# EAGLE board ArduinoMiniProgrammer (EAGLE 7.6.0)
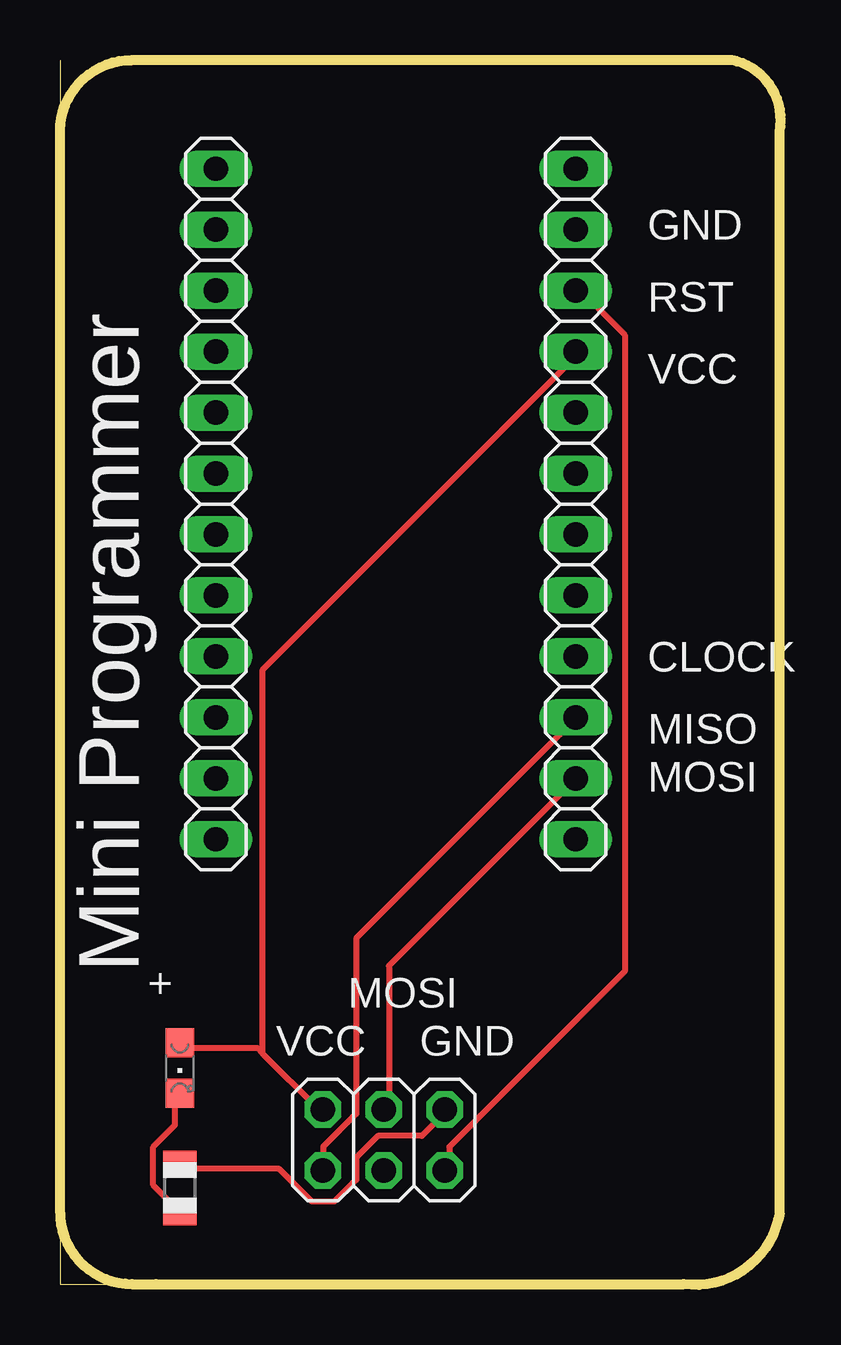
[diagram p0: board, top side]
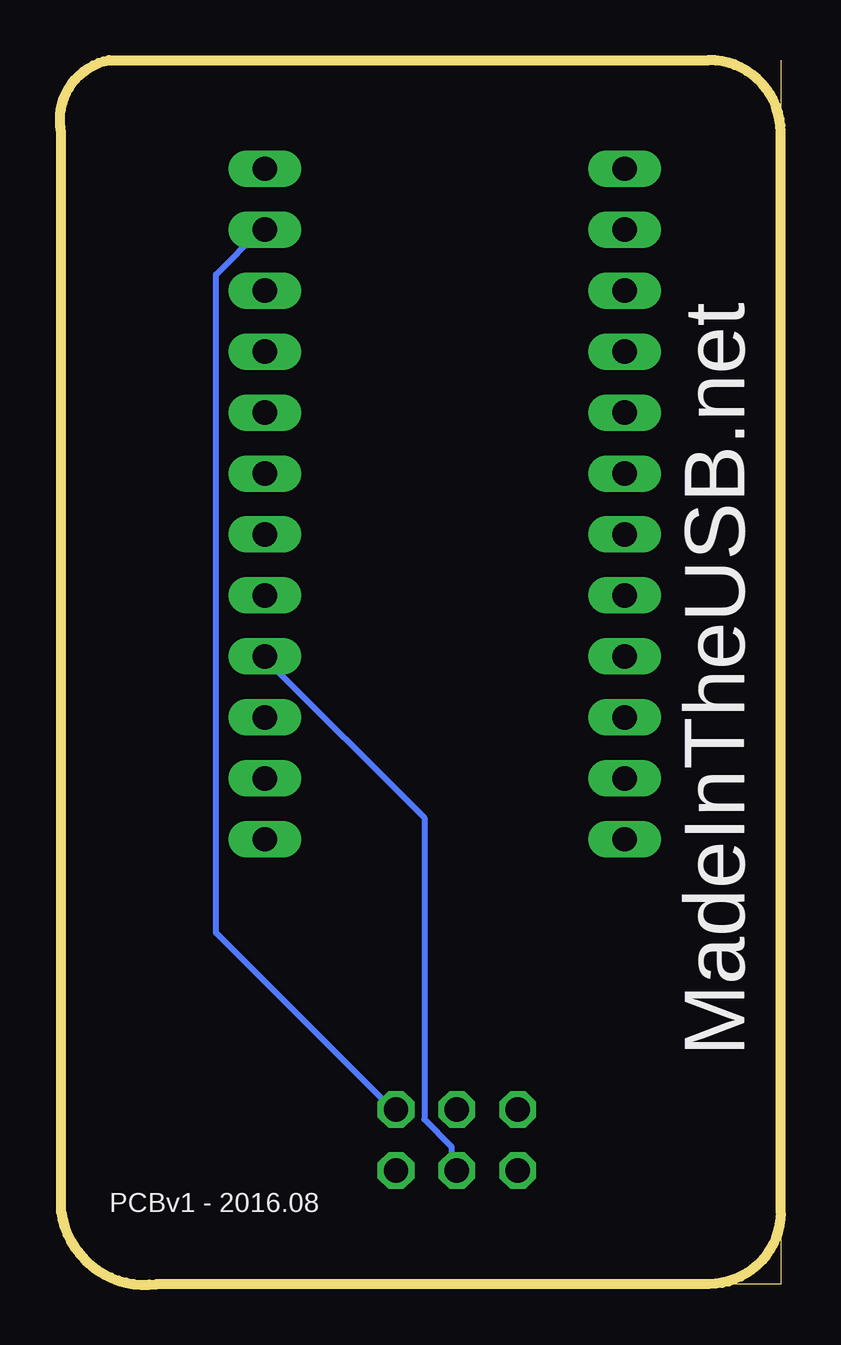
[diagram p1: board, bottom side, seen from below]

Size 30.05 x 51.03 mm. Coordinates in mm from the lower left corner, seen from the top.
Outline: 4,0.03 0,0.03 0,3.03
Outline: 24,0.03 26,0.03
Outline: 26,0.03 27,0.03
Outline: 0,51.03 0,48.03
Outline: 0,48.03 0,42.03
Outline: 0,3.03 arc90 3,0.03 4,0.03
Outline: 4,0.03 26,0.03
Outline: 26,0.03 arc90 30,3.03 30,48.03 arc90 28,51.03 3,51.03 arc90 0,48.03
Outline: 0,3.03 0,48.03
Copper layers (1*16): Top 0.035mm / dielectric 1.5mm / Bottom 0.035mm
Design rules "default": minimum track width 10mil, minimum drill 24mil, track to track 8mil, track to pad 8mil, pad to pad 8mil, via to via 8mil, smd to smd 8mil, copper to edge 40mil, drill to drill 8mil, minimum pad ring 10mil, minimum via ring 8mil, stop-mask expansion 4mil, vias tented up to drill 0mil, thermal gap 10mil

## Footprints (pad centres in the part's own frame; a part is rotated, then mirrored left to right if it is on the bottom)
1X12 = drill 1.016 long: 1 -13.97,0; 2 -11.43,0; 3 -8.89,0; 4 -6.35,0; 5 -3.81,0; 6 -1.27,0; 7 1.27,0; 8 3.81,0; 9 6.35,0; 10 8.89,0; 11 11.43,0; 12 13.97,0
2X03 = drill 1.016 octagon: 1 -2.54,-1.27; 2 -2.54,1.27; 3 0,-1.27; 4 0,1.27; 5 2.54,-1.27; 6 2.54,1.27
CHIPLED_0805 = smd 1.2 x 1.2: A 0,-1.05; C 0,1.05
R0805 = smd 1.1 x 1.4: 1 -1,0; 2 1,0

## Placement (x,y rotation side)
JP1  [1X12]  21.5,32.53 270 top
JP2  [1X12]  6.5,32.53 90 top
JP3  [2X03]  13.5,6.03 0 top
LED1  [CHIPLED_0805]  5,9.03 180 top
R1  [R0805]  5,4.03 270 top

## Library data of the parts
JP1 JP2 LED1 R1 = adafruit
JP3 = pinhead

## Nets
A0_SECURITY: LED1.C R1.2
D11_MOSI: JP1.11 JP3.4
D12_MISO: JP1.10 JP3.1
D13_SCK: JP1.9 JP3.3
GND: JP1.2 JP3.6 R1.1
RST: JP1.3 JP3.5
VCC: JP1.4 JP3.2 LED1.A

## Tracks (layer width: path | path; a pad name or v marks a point on that pad's centre or on a via)
A0_SECURITY
  Top 0.254: LED1.C 4.8,7.8 4.8,6.66 3.89,5.75 3.89,4.15 4.8,3.23 R1.2
D11_MOSI
  Top 0.254: JP3.4 13.72,7.35 13.72,13.29 21.49,21.06 JP1.11
D12_MISO
  Top 0.254: JP3.1 10.97,4.83 10.97,5.75 12.34,7.12 12.34,14.43 21.49,23.58 JP1.10
D13_SCK
  Bottom 0.254: JP3.3 13.72,4.83 13.72,5.75 14.86,6.89 14.86,19.46 21.49,26.09 JP1.9
GND
  Top 0.254: R1.1 5.03,4.83 9.14,4.83 10.52,3.46 11.43,3.46 12.34,4.38 12.34,5.29 13.26,6.2 15.09,6.2 16,7.12 JP3.6
  Bottom 0.254: JP1.2 21.72,43.92 23.55,42.09 23.55,14.66 16.23,7.35 JP3.6
RST
  Top 0.254: JP3.5 16.23,4.83 16.23,5.75 23.55,13.06 23.55,39.58 21.72,41.41 JP1.3
VCC
  Top 0.254: 8.46,9.63 10.74,7.35 JP3.2 | 8.46,9.63 8.23,9.86 5.03,9.86 LED1.A | 8.46,9.63 8.46,25.64 21.49,38.67 JP1.4

## Text on the board
tNames: GND | RST | VCC | CLOCK | MISO | MOSI | Mini Programmer | + | MOSI | VCC | GND
bNames: MadeInTheUSB.net | PCBv1 - 2016.08